# EAGLE board wagband_schematic_pre_route (EAGLE 7.5.0)
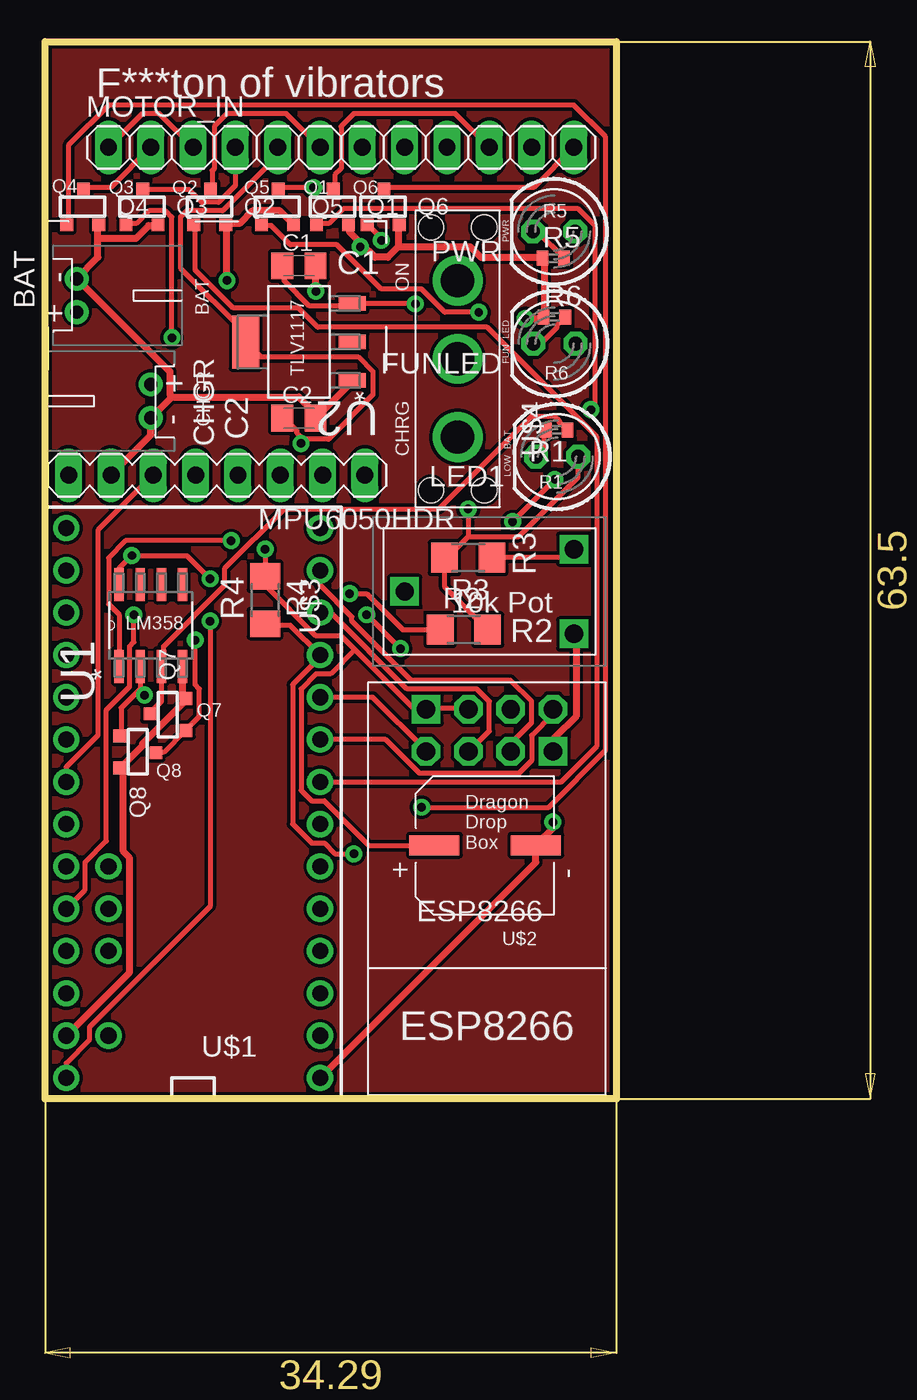
[diagram p0: board, top side]
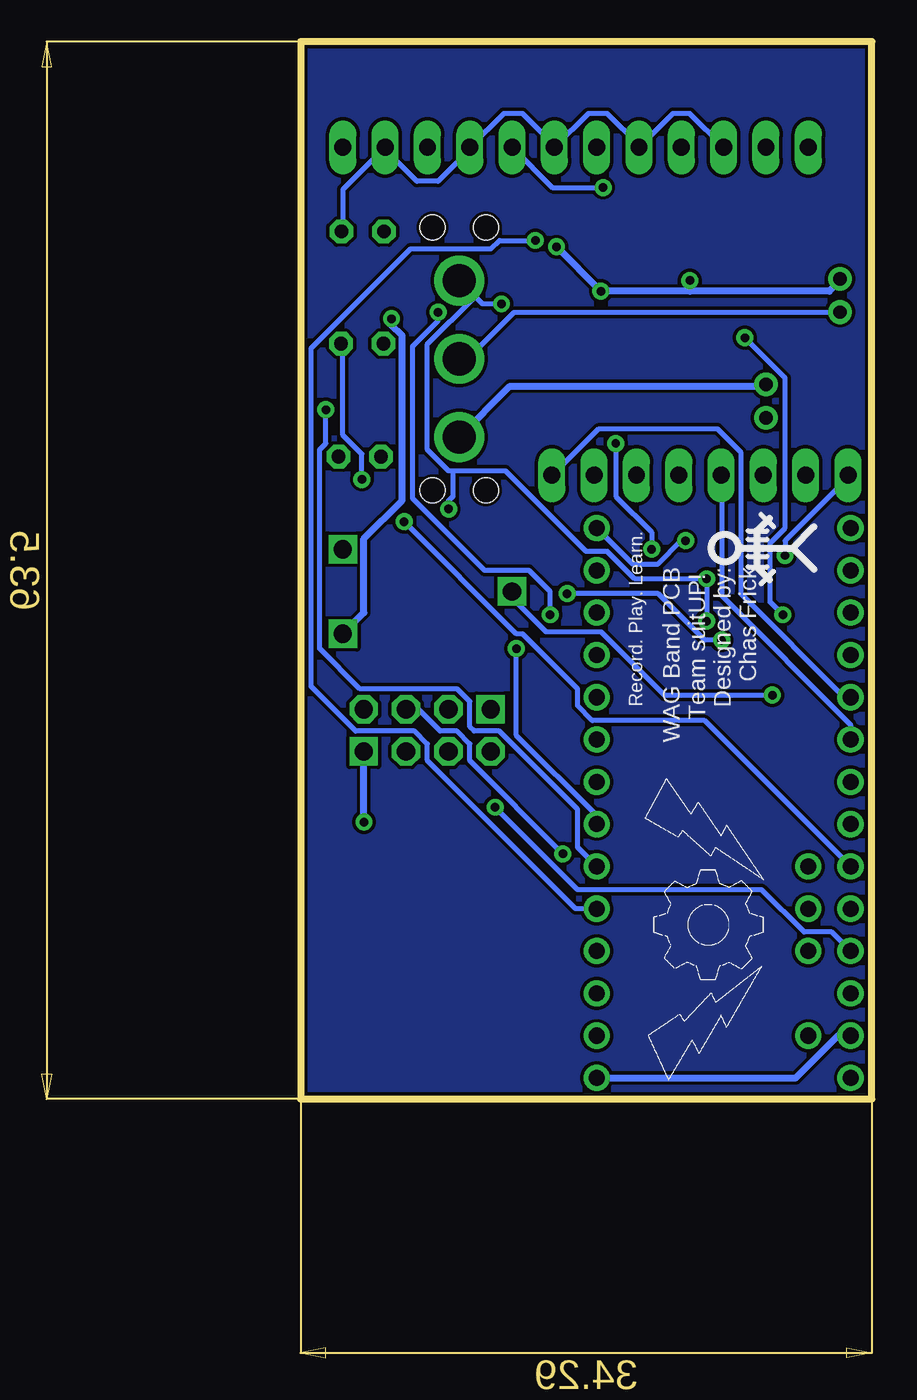
[diagram p1: board, bottom side, seen from below]

Size 34.29 x 63.5 mm. Coordinates in mm from the lower left corner, seen from the top.
Outline: 0,0 0,63.5 34.29,63.5 34.29,0 0,0
Copper layers (1*16): Top 0.035mm / dielectric 1.5mm / Bottom 0.035mm
Design rules "SparkFun": minimum track width 8mil, minimum drill 20mil, track to track 8mil, track to pad 8mil, pad to pad 8mil, via to via 8mil, smd to smd 8mil, copper to edge 8mil, drill to drill 8mil, minimum pad ring 12mil, minimum via ring 10mil, stop-mask expansion 4mil, vias tented up to drill 20mil, thermal gap 10mil
Net classes: 0 default: width 0.305 mm; 1 GND: width 0.406 mm; 2 VCC: width 0.406 mm

## Footprints (pad centres in the part's own frame; a part is rotated, then mirrored left to right if it is on the bottom)
JST-PH-2-THM-RA = drill 0.8 pad 1.422: 1 1,0; 2 -1,0
C0805K = smd 1.3 x 1.6: 1 -1,0; 2 1,0
ESP01 = drill 1.1 octagon: CH_PD -1.285,-8.178; GPIO0 1.255,-5.638; GPIO2 -1.285,-5.638; RST 1.255,-8.178; RX 3.795,-5.638; TX -3.825,-8.178 | drill 1.1 square: GND -3.825,-5.638; VCC 3.795,-8.178
LED5MM = drill 0.813 octagon: A -1.27,0; K 1.27,0
1X12 = drill 1.016 long: 1 -13.97,0; 2 -11.43,0; 3 -8.89,0; 4 -6.35,0; 5 -3.81,0; 6 -1.27,0; 7 1.27,0; 8 3.81,0; 9 6.35,0; 10 8.89,0; 11 11.43,0; 12 13.97,0
MPU6050 = drill 1.016 long: ADD 6.35,0; GND -6.35,0; INT 8.89,0; SCL -3.81,0; SDA -1.27,0; VCC -8.89,0; XCL 3.81,0; XDA 1.27,0
SOT-23 = smd 0.762 x 0.762: 1 -0.979,-1.101; 2 0.94,-1.101; 3 0.025,1.067
R0402 = smd 0.7 x 0.9: 1 -0.65,0; 2 0.65,0
R1206 = smd 1.6 x 1.803: 1 -1.422,0; 2 1.422,0
SOIC127P600X175-8N = smd 1.981 x 0.559: 1 -2.464,1.905; 2 -2.464,0.635; 3 -2.464,-0.635; 4 -2.464,-1.905; 5 2.464,-1.905; 6 2.464,-0.635; 7 2.464,0.635; 8 2.464,1.905
SOT230P700X180-4N = smd 1.626 x 0.889: 1 -3.2,2.311; 2 -3.2,0; 3 -3.2,-2.311 | smd 1.626 x 3.175: 4 3.2,0
TEENSY3-DIL+4 = drill 0.965: 0 -7.62,13.97; 1 -7.62,11.43; 2 -7.62,8.89; 3 -7.62,6.35; 3.3V 7.62,11.43; 4 -7.62,3.81; 5 -7.62,1.27; 6 -7.62,-1.27; 7 -7.62,-3.81; 8 -7.62,-6.35; 9 -7.62,-8.89; 10 -7.62,-11.43; 11 -7.62,-13.97; 12 -7.62,-16.51; 13 7.62,-16.51; 14/A0 7.62,-13.97; 15/A1 7.62,-11.43; 16/A2 7.62,-8.89; 17/A3 7.62,-6.35; 18/A4 7.62,-3.81; 19/A5 7.62,-1.27; 20/A6 7.62,1.27; 21/A7 7.62,3.81; 22/A8 7.62,6.35; 23/A9 7.62,8.89; A10 5.08,6.35; A11 5.08,3.81; AGND 7.62,13.97; AREF 5.08,8.89; GND -7.62,16.51; VIN 7.62,16.51; VUSB 5.08,13.97
TZV1000M = smd 1.2 x 3: + 0,3.05; - 0,-3.05
CB10 = drill 1.1 square: P$1 -2.54,-5.08; P$2 2.54,-5.08; P$3 0,5.08
SPDT = drill 2: P$1 0,-4.699; P$2 0,0; P$3 0,4.699 | hole 1.5: 1.6,7.899; -1.6,-7.899; 1.6,-7.899; -1.6,7.899

## Placement (x,y rotation side)
BAT  [JST-PH-2-THM-RA]  1.91,48.26 270 top
C1  105  [C0805K]  15.24,50.04 0 top
C2  105  [C0805K]  15.24,40.89 0 top
CHGR  [JST-PH-2-THM-RA]  6.35,41.91 90 top
ESP8266  ESP01  [ESP01]  26.67,15.24 180 top
FUNLED  [LED5MM]  30.58,45.36 180 top
LED1  [LED5MM]  30.73,38.58 180 top
MOTOR_IN  [1X12]  17.78,57.15 0 top
MPU6050HDR  [MPU6050]  10.31,37.47 0 top
PWR  [LED5MM]  30.56,52.1 180 top
Q1  [SOT-23]  17.27,53.59 0 top
Q2  [SOT-23]  9.91,53.59 0 top
Q3  [SOT-23]  5.84,53.59 0 top
Q4  [SOT-23]  2.29,53.59 0 top
Q5  [SOT-23]  13.97,53.59 0 top
Q6  [SOT-23]  20.32,53.59 0 top
Q7  [SOT-23]  7.37,23.11 90 top
Q8  [SOT-23]  5.59,20.83 270 top
R1  1k  [R0402]  30.71,40.18 180 top
R2  30k  [R1206]  25.15,28.19 0 top
R3  30k  [R1206]  25.4,32.51 180 top
R4  10k  [R1206]  13.21,29.97 270 top
R5  1k  [R0402]  30.51,50.5 0 top
R6  1k  [R0402]  30.58,46.96 0 top
U1  LM358DR  [SOIC127P600X175-8N]  6.35,28.45 90 top
U2  TLV1117-33CDCY  [SOT230P700X180-4N]  15.24,45.47 180 top
U$1  TEENSY_3.1_DIL+4  [TEENSY3-DIL+4]  8.89,17.78 180 top
U$2  TZVCAP  [TZV1000M]  26.42,15.24 90 top
U$3  CB10LV103M  [CB10]  26.67,30.48 90 top
U$4  MS12ASW13  [SPDT]  24.77,44.45 0 top

## Library data of the parts
BAT CHGR = adafruit
C1 C2 R1-R6 = resistor
ESP8266 MPU6050HDR Q1-Q8 U$2-U$4 = mqp_custom_parts
FUNLED LED1 PWR = led
MOTOR_IN = pinhead
U1 = Texas Instruments_By_element14_Batch_1; MPN: LM358DR; OC_FARNELL: 1831865; OC_NEWARK: 34K7599; PACKAGE: SOIC-8; SUPPLIER: Texas Instruments
U2 = Texas Instruments_By_element14_Batch_1; MPN: TLV1117-33CDCY; OC_FARNELL: 1494942; OC_NEWARK: 67K8520; PACKAGE: SOT-223-3; SUPPLIER: TEXAS INSTRUMENTS
U$1 = Teensy_3_and_LC_Series_Boards_v1.1

## Nets
3.3V: U$1.3.3V
AREF: U$1.AREF
ESP8266_!RST: ESP8266.CH_PD R4.2 U$1.9
ESP8266_RX: ESP8266.RX U$1.8
ESP8266_TX: ESP8266.TX U$1.7
GND [GND]: BAT.2 C1.2 C2.2 CHGR.2 ESP8266.GND MPU6050HDR.GND Q1.2 Q2.2 Q3.2 Q4.2 Q5.2 Q6.2 Q7.2 Q8.2 R5.1 R6.1 U1.4 U2.1 U$1.AGND U$1.GND U$2.- U$3.P$1
GPIO0: ESP8266.GPIO0 U$1.10
GPIO2: ESP8266.GPIO2 U$1.11
LED_REF: Q7.3 R1.1 U1.3
LOW_BATT_DIO: U1.1 U$1.12
M1: Q1.1 U$1.4
M2: Q2.1 U$1.6
M3: Q3.1 U$1.22/A8
M4: Q4.1 U$1.23/A9
M5: Q5.1 U$1.5
M6: Q6.1 U$1.3
N$1: MPU6050HDR.INT U$1.17/A3
N$2: MPU6050HDR.SDA U$1.18/A4
N$3: FUNLED.A U$1.21/A7
N$4: FUNLED.K R6.2
N$9: MOTOR_IN.12 Q6.3
N$10: MOTOR_IN.10 Q1.3
N$11: MOTOR_IN.8 Q5.3
N$13: MOTOR_IN.6 Q2.3
N$14: MOTOR_IN.2 Q4.3
N$15: MOTOR_IN.4 Q3.3
N$17: MPU6050HDR.SCL U$1.19/A5
N$21: PWR.K R5.2
N$22: LED1.K R1.2
N$23: Q7.1 Q8.3 R2.1
N$27: R3.1 U$3.P$2
N$28: BAT.1 U$4.P$2
N$29 [VCC]: CHGR.1 U$4.P$1
POT_REF: Q8.1 U1.2 U$3.P$3
VCC: C2.1 ESP8266.RST ESP8266.VCC MOTOR_IN.1 MOTOR_IN.3 MOTOR_IN.5 MOTOR_IN.7 MOTOR_IN.9 MOTOR_IN.11 PWR.A R4.1 U2.4 U$2.+
VDD: C1.1 LED1.A MPU6050HDR.VCC R2.2 R3.2 U1.8 U2.3 U$1.VIN U$4.P$3
VUSB: U$1.VUSB

## Tracks (layer width: path | path; a pad name or v marks a point on that pad's centre or on a via)
ESP8266_!RST  (via drill 0.51)
  Top 0.305: R4.2 13.21,28.45 14.73,28.45 U$1.9 16.51,26.54 14.86,24.89 14.86,16.51 16,15.37 16.76,15.37 17.4,14.73 v18.54,14.73
  Bottom 0.305: v18.54,14.73 24.13,20.32 24.13,21.34 24.89,22.1 25.91,22.1 27.18,23.37 27.94,23.37 ESP8266.CH_PD
ESP8266_RX
  Top 0.305: U$1.8 19.68,24.13 22.86,20.95 ESP8266.RX
ESP8266_TX
  Top 0.305: U$1.7 20.45,21.59 22.48,19.56 28.45,19.56 29.21,20.32 29.21,21.84 30.48,23.11 30.48,23.37 ESP8266.TX
GND  (via drill 0.51)
  Top 0.406: U2.1 18.41,43.05 16.26,40.89 C2.2 16.26,41.15 15.24,42.16 7.62,42.16 | MPU6050HDR.GND 3.94,37.47 6.35,39.88 CHGR.2 6.48,41.02 7.62,42.16 | 19.05,51.31 19.81,50.55 20.57,50.55 21.21,51.18 | 19.05,51.31 18.29,52.07 18.29,52.45 Q1.2 | 21.21,51.18 21.21,52.45 Q6.2 | 21.21,51.18 25.53,51.18 26.16,50.55 29.72,50.55 R5.1 29.97,50.42 29.97,46.99 R6.1 29.84,46.86 v28.83,46.86 | Q5.2 14.86,52.58 14.1,53.34 12.45,53.34 11.68,52.58 10.92,52.58 Q2.2 10.92,52.32 v10.92,49.15 | 3.17,51.69 3.17,50.55 1.91,49.28 BAT.2 2.03,49.15 7.49,43.69 7.49,42.29 7.62,42.16 | 3.17,51.69 3.17,52.45 Q4.2 | 3.17,51.69 5.46,51.69 6.22,52.45 6.73,52.45 Q3.2 | v16.26,48.51 16.26,50.04 C1.2 | v18.92,51.18 19.05,51.31 | U$3.P$1 31.88,27.81 31.88,22.99 30.61,21.72 30.61,20.95 ESP8266.GND | U1.4 8.26,24 Q7.2 8.51,24 5.84,21.34 5.84,21.21 4.57,19.94 Q8.2 4.7,19.81 4.7,14.86 5.08,14.48 5.08,7.62 U$1.AGND | U$1.GND 29.46,14.22 U$2.- 29.59,15.37 30.48,16.26 v30.48,16.64
  Bottom 0.406: 10.92,48.51 2.54,48.51 1.91,49.15 BAT.2 | 10.92,48.51 v16.26,48.51 v18.92,51.18 | 10.92,48.51 v10.92,49.15 | U$1.AGND 2.03,3.81 4.57,1.27 U$1.GND | v30.48,16.64 30.48,20.83 ESP8266.GND | v28.83,46.86 28.83,46.48 28.19,45.85 28.19,35.94 30.48,33.66 30.48,29.21 U$3.P$1
GPIO0
  Top 0.305: U$1.10 17.14,29.21 21.72,24.64 25.91,24.64 26.67,23.88 26.67,22.1 25.53,20.95 ESP8266.GPIO0
GPIO2
  Top 0.305: U$1.11 16.51,30.86 18.41,28.96 18.41,28.7 21.97,25.15 27.94,25.15 29.21,23.88 29.21,22.61 28.07,21.46 28.07,20.95 ESP8266.GPIO2
LED_REF
  Top 0.305: Q7.3 6.35,23.24 6.99,23.88 U1.3 7.11,26.04 7.11,27.18 10.79,30.86 10.79,31.88 14.35,35.43 23.62,35.43 29.21,41.02 30.61,41.02 30.86,40.77 30.86,40.64 31.24,40.26 R1.1
LOW_BATT_DIO  (via drill 0.51)
  Top 0.305: U1.1 4.45,29.08 3.81,29.72 3.81,32.51 4.83,33.53 v11.18,33.53
  Bottom 0.305: v11.18,33.53 11.43,33.53 12.83,32.13 14.35,32.13 U$1.12
M1  (via drill 0.51)
  Top 0.305: v32.77,41.4 33.02,41.66 33.02,52.45 32,53.47 17.91,53.47 17.02,52.58 16.38,52.58 Q1.1
  Bottom 0.305: v32.77,41.4 32.77,39.37 33.15,38.99 33.15,27.05 30.73,24.64 24.89,24.64 24.13,23.88 24.13,22.35 23.88,22.1 22.35,22.1 17.65,17.4 17.65,15.11 U$1.4
M2
  Top 0.305: U$1.6 30.99,19.05 33.15,21.21 33.15,39.75 26.54,46.35 16.38,46.35 15.24,47.5 11.3,47.5 9.02,49.78 9.02,52.45 Q2.1
M3  (via drill 0.51)
  Top 0.305: v7.62,45.72 7.62,52.96 7.24,53.34 6.22,53.34 5.46,52.58 4.95,52.58 Q3.1 | v5.33,29.08 5.33,27.43 5.08,27.18 5.08,24.77 3.68,23.37 3.68,15.49 2.41,14.22 2.41,12.57 U$1.22/A8
  Bottom 0.305: v7.62,45.72 5.21,43.31 5.21,34.29 6.1,33.4 6.1,29.84 v5.33,29.08
M4  (via drill 0.51)
  Top 0.305: v22.61,17.53 30.23,17.53 33.66,20.95 33.66,57.78 31.75,59.69 3.81,59.69 1.4,57.28 1.4,52.58 Q4.1
  Bottom 0.305: v22.61,17.53 17.65,12.57 6.6,12.57 4.06,10.03 2.41,10.03 U$1.23/A9
M5  (via drill 0.51)
  Top 0.305: v26.04,47.24 24,47.24 22.61,48.64 20.19,48.64 17.53,51.31 14.73,51.31 13.59,52.45 13.08,52.45 Q5.1 | v21.34,27.05 v19.3,29.08
  Bottom 0.305: v26.04,47.24 26.04,46.74 27.56,45.21 27.56,36.07 23.24,31.75 20.57,31.75 19.3,30.48 v19.3,29.08 | v21.34,27.05 21.34,21.84 16.51,17.02 U$1.5
M6  (via drill 0.51)
  Top 0.305: v20.19,51.56 20.19,51.69 19.43,52.45 Q6.1
  Bottom 0.305: v20.19,51.56 22.35,51.56 22.86,51.05 27.69,51.05 33.66,45.09 33.66,24.77 30.99,22.1 27.43,22.1 26.67,21.34 26.67,20.32 17.78,11.43 U$1.3
N$1
  Bottom 0.305: U$1.17/A3 1.65,24.13 7.87,30.35 7.87,38.86 9.27,40.26 16.38,40.26 19.18,37.47 MPU6050HDR.INT
N$2
  Bottom 0.305: U$1.18/A4 1.27,22.48 9.02,30.23 9.02,37.47 MPU6050HDR.SDA
N$3  (via drill 0.51)
  Top 0.305: v28.07,34.67 v30.61,37.21
  Bottom 0.305: v30.61,37.21 30.61,38.73 31.75,39.88 31.75,45.34 FUNLED.A | v28.07,34.67 21.34,27.94 20.95,27.94 17.65,24.64 17.65,23.62 16.76,22.73 10.03,22.73 U$1.21/A7
N$4
  Top 0.305: R6.2 31.11,46.86 30.73,46.48 30.73,46.35 29.84,45.47 29.34,45.47 FUNLED.K
N$5
  pour Bottom: 0,0 34.29,0 34.29,63.5 0,63.5
N$6
  pour Top: 0,0 34.29,0 34.29,63.5 0,63.5
N$9
  Top 0.305: MOTOR_IN.12 29.34,54.74 20.45,54.74 Q6.3
N$10
  Top 0.305: MOTOR_IN.10 24.64,59.18 18.54,59.18 17.78,58.42 17.78,55.88 17.4,55.5 17.4,54.74 Q1.3
N$11  (via drill 0.51)
  Top 0.305: v16.13,54.74 14.1,54.74 Q5.3
  Bottom 0.305: v16.13,54.74 19.18,54.74 MOTOR_IN.8
N$13
  Top 0.305: MOTOR_IN.6 14.48,59.18 10.92,59.18 10.16,58.42 10.16,55.88 10.03,55.75 10.03,54.74 Q2.3
N$14
  Top 0.305: MOTOR_IN.2 3.94,54.74 2.41,54.74 Q4.3
N$15
  Top 0.305: MOTOR_IN.4 11.43,54.86 10.41,53.85 9.4,53.85 8.64,54.61 5.97,54.61 Q3.3
N$17
  Top 0.305: U$1.19/A5 1.27,19.94 3.17,21.84 3.17,34.16 6.48,37.47 MPU6050HDR.SCL
N$21
  Top 0.305: R5.2 31.11,50.55 29.59,52.07 29.34,52.07 PWR.K
N$22
  Top 0.305: R1.2 29.97,40.13 29.97,39.12 29.46,38.61 LED1.K
N$23  (via drill 0.51)
  Top 0.305: Q8.3 6.73,20.83 7.11,20.83 8.38,22.1 Q7.1 8.51,22.23 9.27,22.99 9.27,24.64 9.02,24.89 v9.02,27.56 | R2.1 21.46,28.19 19.3,30.35 v18.29,30.35
  Bottom 0.305: v18.29,30.35 12.83,30.35 10.03,27.56 v9.02,27.56
N$27
  Top 0.305: R3.1 31.24,32.51 U$3.P$2
N$28
  Bottom 0.305: U$4.P$2 24.26,44.45 21.46,47.24 1.91,47.24 BAT.1
N$29
  Bottom 0.406: U$4.P$1 21.72,42.8 6.35,42.8 CHGR.1
POT_REF  (via drill 0.51)
  Top 0.305: 5.65,24.57 5.71,24.64 U1.2 | 5.65,24.57 4.57,23.5 4.57,21.84 Q8.1 | v5.97,24.26 5.65,24.57
  Bottom 0.305: v5.97,24.26 12.45,24.26 16.26,28.07 19.56,28.07 21.59,30.1 U$3.P$3
VCC  (via drill 0.51)
  Top 0.305: 18.61,26.99 22.1,23.5 22.86,23.5 ESP8266.VCC 22.99,23.5 25.4,23.5 ESP8266.RST | 18.61,26.99 17.78,27.81 16.26,27.81 13.21,30.86 R4.1 v13.21,33.02 | U$2.+ 19.43,15.24 16.76,17.91 16,17.91 15.37,18.54 15.37,24.64 16.26,25.53 17.14,25.53 18.61,26.99 | 15.49,39.62 15.11,40.01 15.11,40.13 14.35,40.89 C2.1 | 15.49,39.62 17.02,39.62 19.68,42.29 19.68,43.69 18.8,44.58 12.95,44.58 12.06,45.47 U2.4 12.06,45.59 12.06,45.97 8.13,49.91 8.13,52.96 8.51,53.34 10.67,53.34 13.97,56.64 MOTOR_IN.5 | MOTOR_IN.1 5.84,59.18 6.86,59.18 MOTOR_IN.3 | v15.37,39.37 15.49,39.5 15.49,39.62
  Bottom 0.305: PWR.A 31.75,52.2 31.75,54.61 MOTOR_IN.11 29.21,57.02 27.3,55.12 26.04,55.12 24.13,57.02 MOTOR_IN.9 22.1,59.18 20.95,59.18 19.05,57.28 MOTOR_IN.7 17.02,59.18 15.88,59.18 13.97,57.28 MOTOR_IN.5 11.94,59.18 10.92,59.18 MOTOR_IN.3 | v13.21,33.02 13.21,34.04 15.37,36.2 v15.37,39.37
VDD  (via drill 0.51)
  Top 0.305: R2.2 26.54,28.19 24,30.73 24,32.51 R3.2 24.13,32.51 25.4,33.78 | LED1.A 32,37.34 28.45,33.78 25.4,33.78 | C1.1 14.35,50.04 14.35,49.15 15.88,47.62 18.29,47.62 U2.3 18.54,47.75 v22.23,47.75 | U1.8 4.45,31.88 v5.21,32.64 8.51,32.64 v9.91,31.24 | U$1.VIN 1.27,2.16 2.67,3.56 2.67,4.32 9.91,11.56 v9.91,28.7 | v25.4,35.43 25.4,33.78
  Bottom 0.305: v22.23,47.75 23.37,47.75 U$4.P$3 23.88,48.13 26.67,45.34 26.67,38.99 25.4,37.72 25.15,37.72 | v5.21,32.64 5.21,33.53 1.52,37.21 1.52,37.47 MPU6050HDR.VCC | v9.91,28.7 v9.91,31.24 14.22,31.24 15.88,32.89 17.14,32.89 21.97,37.72 25.15,37.72 | v25.4,35.43 25.4,35.94 25.15,36.2 25.15,37.72

## Text on the board
tPlace: F***ton of vibrators | Q4 | Q3 | Q2 | Q5 | Q1 | Q6 | R5 | PWR | C1 | BAT | ON | TLV1117 | FUN_LED | R6 | CHGR | C2 | LOW_BAT | CHRG | R1 | R3 | R4 | LM358 | R2 | Q7 | Q8 | Dragon / Drop / Box
bPlace: Record. Play. Learn. | WAG Band PCB / Team suitUP! / Designed by: / Chas Frick
201bmp: C:/Users/Chas/Desktop/Untitled.bmp